# Altium PCB JacdacNRF52833HighPower 32.PcbDoc (part 2 of 2)
Units mil, origin at the board's own origin, x right, y up, seen from the top; angles counter-clockwise.
Board outline 1541.27 x 1415.28 mil, 2 copper layers (Top Layer, Bottom Layer), stack 60.044 mil thick; 63 components, 36 nets, 260 pads, 44 vias.
Unrouted connection lines stored in the file: 13.
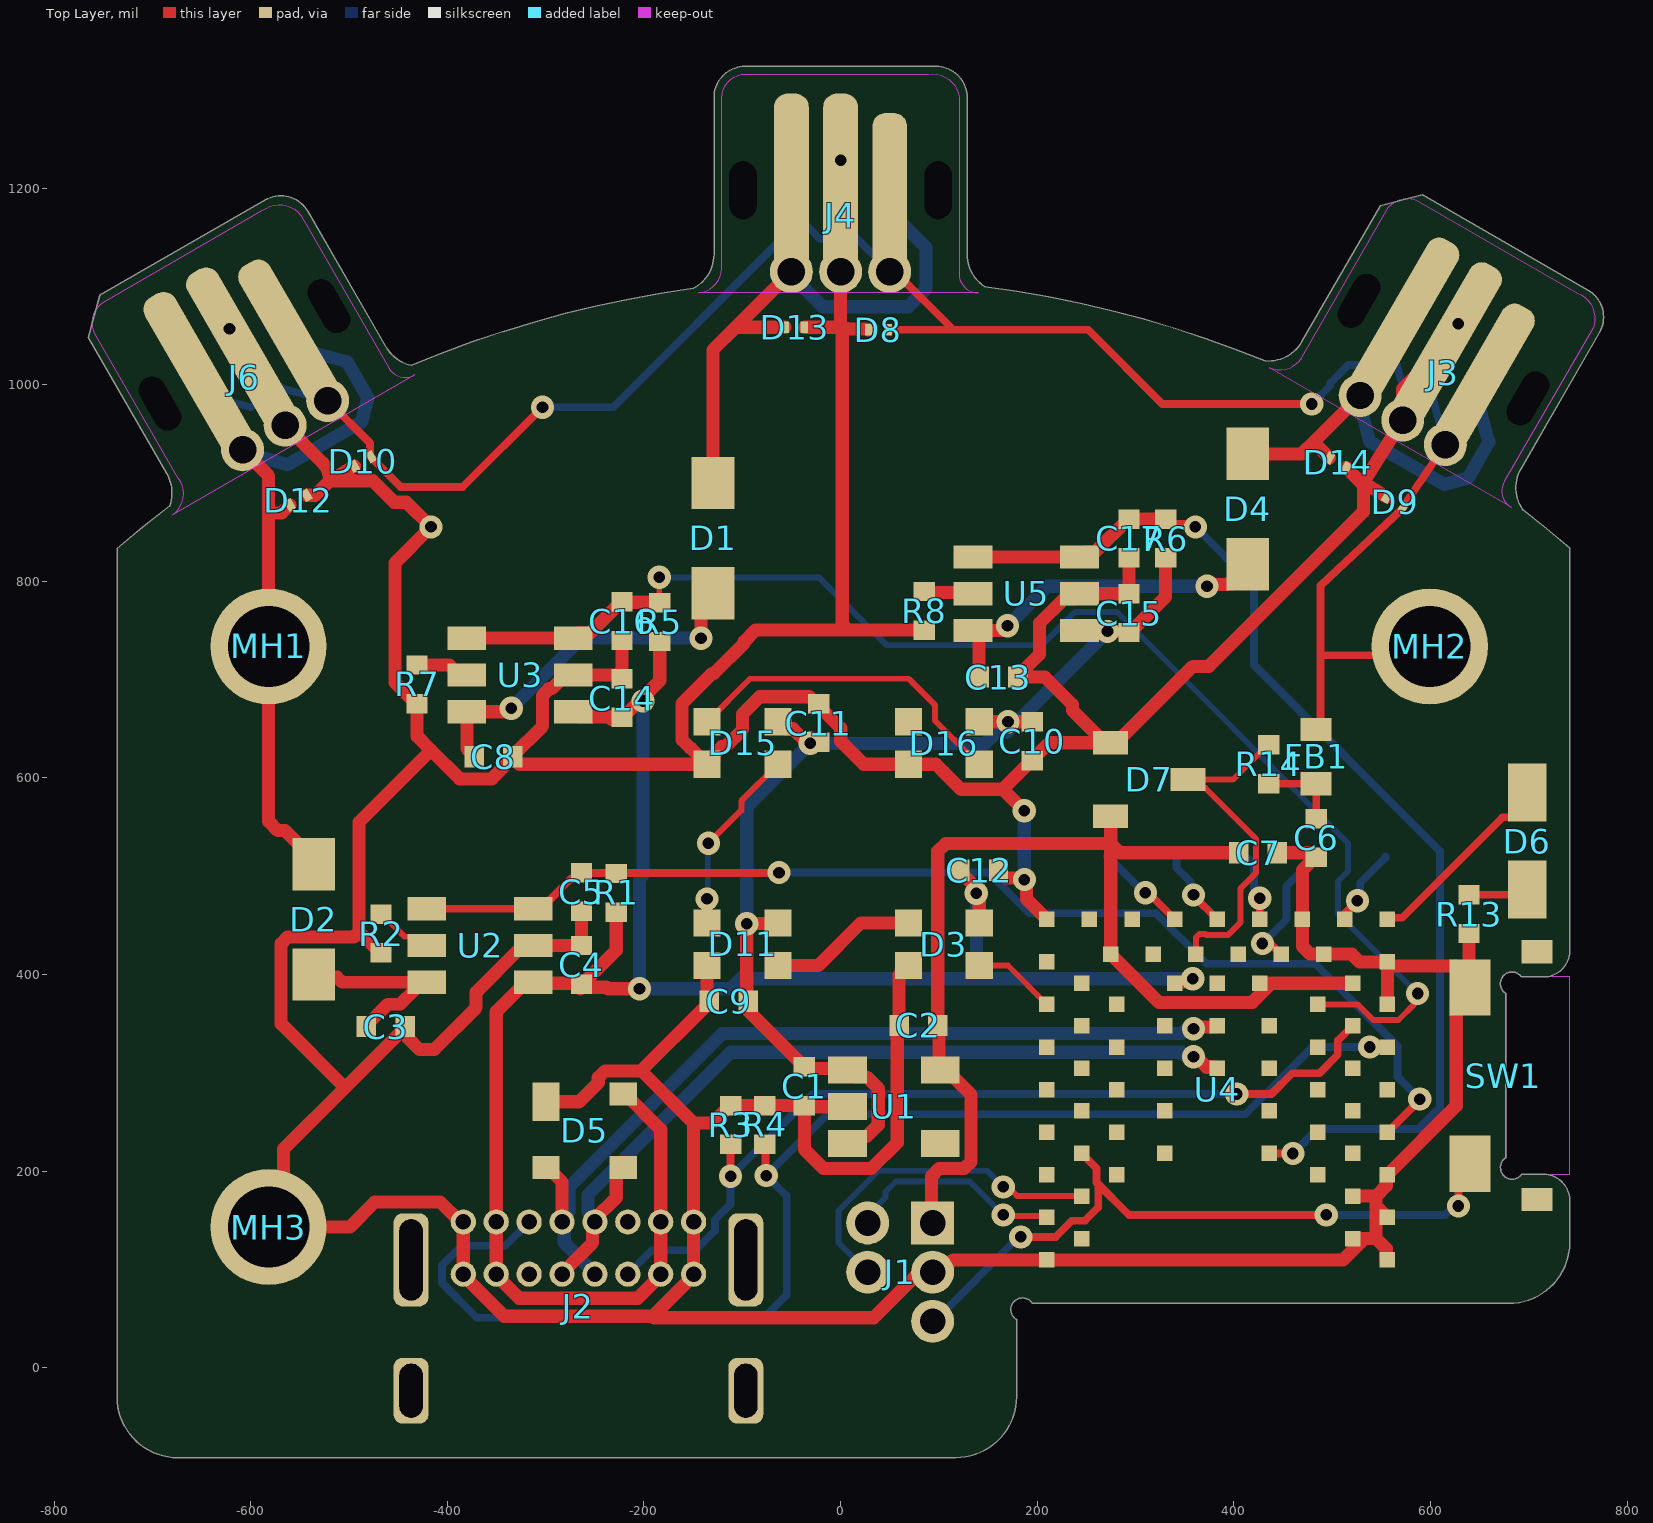
[diagram p0: Top Layer view]

## Via types
v1: diameter 23.62, hole 11.81, Top Layer to Bottom Layer, tented both sides, 44 vias

## Nets (pads, with @x,y where several pads share a name; then routed paths per layer and width w, separated by ;. In a path a pad name is that pad's centre, name@x,y a point inside that pad or via, vN(x,y) a via of type N, cw(c..) or ccw(c..) an arc to the next point about the centre after c; other vN are vias at no path point) (continued)
GND: (continued)
  Top Layer w13.39: J6.2@-565.04,958.7 -527.17,920.84 cw(c-545.77,902.24) -519.47,902.24 ; D12.2 -534.18,887.53 -519.47,902.24 ; D10.2 -519.47,902.24 ; R2.1 -468.42,421.99 -489.88,443.44 ; D5.1 -265.98,270.58 -246.5,290.07 -246.5,295.08 -239.69,301.88 -202.51,301.88 ; C5.1 C4.1 U2.2 -317.69,424.45 -328.21,424.45 -370.78,381.89 -370.78,366.29 -413.34,323.73 -428.35,323.73 -439.79,335.17 -439.79,346.05 -441.38,347.64 -504.08,284.95 ; C16.1 -222.32,709.53 -227.11,704.75 U3.2 -279.74,704.75 -293.72,690.77 -296.36,690.77 -303.17,683.97 -303.17,652.7 -333.4,622.47 C8.1 C8.1@-333.4,620.5 ; D11.2 C9.1@-135.75,369.4 ; C9.1 -135.75,370.38 C9.1@-135.75,369.4 ; D13.2 -2.47,1058.44 -1,1056.97 ; 0,1064.57 J4.2@0,1115.08 ; U1.2 C1.1@-36.86,265.58 ; D8.2 27.61,1056.73 7.84,1056.73 7.6,1056.97 -1,1056.97 ; D3.2 59.55,399.68 C2.1 57.58,346.26 57.58,228.91 31.46,202.78 -17.54,202.78 -36.86,222.1 C1.1@-36.86,265.58 ; R8.1 7.84,750.3 ; v1(186.83,566.51) 164.89,588.44 ; v1(187,496.58) 188.96,494.63 188.96,477.05 U4.30 ; C17.1 293.46,787.41 C15.1 243.05,787.36 U5.2 237.88,782.3 227.36,782.3 202.33,757.27 202.33,725.59 180.25,703.51 C13.1 207.93,702.53 235.81,674.65 235.81,668.74 D7.1@268.81,635.75 ; C7.1 478.23,523.79 482.78,519.25 469.7,506.17 U4.19 469.7,428.56 477.54,420.72 U4.18 519.9,420.72 527.77,412.84 U4.15 ; D14.2 514.33,915.37 529.09,900.61 531.86,900.61 ; U4.2 532.84,131.35 ; U4.4 544.8,174.65 ; D9.2 531.86,900.61 ; U4.1 555.13,110.88 555.13,121.01 544.8,131.35 ; U4.3 544.8,164.52 ; U4.13 U4.15 ; J3.2@615.16,1038.99 571.86,995.68 571.86,963.98 531.86,900.61 ; R13.1 SW1.2@639.27,395.58 ; -519.47,902.24 -475.85,902.24 -454.03,880.42 -441.74,880.42 v1(-416.6,855.29) -453.2,818.69 -453.2,696.88 -431.75,675.42 R7.1 -430.76,642.38 -416.6,628.22 ; -504.08,284.95 -566.78,222.25 -566.78,158.13 MH3.1 -499.24,143.11 -473.76,168.59 -407.32,168.59 -387.04,148.32 J2.A1 J2.B12 -383.74,94.11 -342.08,52.45 -191.15,52.45 ; -504.08,284.95 -569.06,349.92 -569.06,431.43 -562.25,438.24 -495.08,438.24 -489.88,443.44 ; -489.88,443.44 -489.88,554.94 -416.6,628.22 ; -416.6,628.22 -387.43,599.04 -354.86,599.04 C8.1@-333.4,620.5 ; C8.1@-333.4,620.5 -326.74,613.84 D15.2 ; -202.51,301.88 -202.51,302.63 C9.1@-135.75,369.4 ; -202.51,301.88 -149.49,248.85 ; -191.15,52.45 -189.57,50.88 33.72,50.88 83.48,100.64 90.23,100.64 J1.3 101.81,97.26 114.24,109.69 U4.45 511.18,109.69 532.84,131.35 ; -191.15,52.45 -149.49,94.11 J2.B1 J2.A12 -149.49,248.85 ; -149.49,248.85 -130.65,248.85 -112.83,266.67 R3.2 R4.2 C1.1 C1.1@-36.86,265.58 ; D15.2 -152.3,630.39 -152.98,630.39 -161.14,638.55 -161.14,675.74 -130.59,706.29 -128.73,706.29 -98.18,736.84 -98.18,738.69 -86.58,750.3 7.84,750.3 ; D15.2 -132.59,613.84 -128.66,617.76 -128.66,623.91 -120.82,631.75 -117.16,631.75 -99.72,649.18 -99.72,665.11 -82.29,682.54 -31.6,682.54 0.16,650.78 0.16,637.27 23.59,613.84 D16.2 97.04,613.84 105,605.88 122.43,588.44 164.89,588.44 ; -1,1056.97 1.66,1054.31 1.66,756.48 7.84,750.3 ; 164.89,588.44 194.03,617.58 196,617.58 199.15,620.73 199.15,622.7 212.19,635.75 D7.1@268.81,635.75 ; D7.1@268.81,635.75 D7.1 280.62,635.75 358.31,713.44 374.72,713.44 531.86,870.58 531.86,900.61 ; 532.84,131.35 544.8,131.35 ; 544.8,131.35 544.8,164.52 ; 544.8,164.52 544.8,174.65 ; 544.8,174.65 555.13,184.99 555.13,195.13 U4.5 626.33,266.32 626.33,372.7 SW1.2 639.27,387.71 SW1.2@639.27,395.58 ; U4.15 560.64,408.52 626.33,408.52 SW1.2@639.27,395.58
  Bottom Layer w13.39: v1(186.83,566.51) 186.91,566.42 186.91,496.67 v1(187,496.58)
  other v1: -621.63,1056.73 628.45,1062 0,1228.27
JD_DATA: D8.1 D9.1 D10.1 FB1.1 J3.1 J4.1 J6.1 MH2.1 | length 1884.2
  Top Layer w7.87: J6.1@-521.74,983.7 -478.68,940.64 -478.68,927.78 -476.08,925.19 -476.08,924.47 -447.59,895.97 -384.26,895.97 v1(-303.17,977.06) ; D8.1 109.23,1055.78 ; J4.1@50,1191.85 50,1115.08 55.26,1115.08 111.89,1058.44 109.23,1055.78 ; v1(479.35,980.36) 327.19,980.36 251.77,1055.78 109.23,1055.78 ; FB1.1 488.29,653.65 488.29,724.69 ; MH2.1 590.32,724.69 488.29,724.69 ; J3.1@615.16,938.98 573.6,877.5 D9.1 571.63,874.09 488.29,795.73 488.29,724.69
  Bottom Layer w7.87: v1(-303.17,977.06) -231.17,977.06 -62.64,1145.59 -56.07,1145.59 -51.46,1150.2 J4.1@-51.46,1178.75 ; v1(479.35,980.36) 479.56,980.36 498.04,998.84 498.04,1001.61 516.4,1019.97 536.49,1019.97 559.6,1043.08 580.23,1063.71 J3.1@580.23,1078.48
JD_DATA_MCU: D7.3 R14.1 U4.24 | length 351.8
  Top Layer w6: U4.24 361.43,437.59 364.95,441.11 371.18,441.11 371.93,440.36 394.24,440.36 406.66,452.78 406.66,487.29 422.75,503.38 422.75,537.9 371.12,589.53 362.27,589.53 D7.3 399.31,598.35 434.52,633.55 R14.1
JD_PWR0: D2.1 D12.1 J6.3 MH1.1 | length 480.8
  Top Layer w13.39: J6.3@-608.34,933.7 -581.79,907.15 -581.79,869.48 ; D12.1 -568.38,869.48 -581.79,869.48 ; D2.1 -535.79,517.17 -564.98,546.36 -572.32,546.36 -581.79,555.83 MH1.1 -581.79,869.48
JD_PWR1: D1.1 D13.1 J4.3 | length 298.3
  Top Layer w13.39: D1.1 -129.76,1035.32 -106.64,1058.44 ; D13.1 -106.64,1058.44 ; J4.3@-50,1115.08 -106.64,1058.44
JD_PWR2: D4.1 D14.1 J3.3 | length 162.9
  Top Layer w13.39: D4.1 469.18,929.6 482.78,943.2 ; D14.1 482.78,939.93 482.78,943.2 ; J3.3@528.56,988.98 482.78,943.2
JD_STATUS: D6.2 U4.16 | length 201
  Top Layer w7.87: U4.16 558,457.83 571.34,457.83 673.41,559.9 682.75,559.9 698.49,575.65 D6.2
NEOPIXEL_DATA: D3.3 U4.33 | length 85.2
  Top Layer w6: D3.3 170.28,409.11 U4.33
NetC3_2: C3.2 D2.2 U2.6 | length 202.4
  Top Layer w13: D2.2 -535.79,397.4 -512.14,397.4 -506.91,392.17 -434.03,392.17 U2.6 ; C3.2 -482.31,348.05 -460.58,369.78 -448.07,369.78 -434.03,383.83 -434.03,386.85 -428.9,391.99 U2.6@-420.66,391.99
NetC6_2: C6.2 FB1.2 R14.2 | length 83.7
  Top Layer w7.87: R14.2 483.59,594.18 FB1.2 C6.2
NetC8_2: C8.2 D1.2 U3.6 | length 368.7
  Top Layer w13.39: C8.2 -372.77,622.47 -380.13,629.83 U3.6 -338.43,667.35 v1(-334.99,670.79) ; v1(-142,742.15) -142,775.47 D1.2
  Bottom Layer w13.39: v1(-334.99,670.79) -263.63,742.15 v1(-142,742.15)
NetC13_2: C13.2 D4.2 U5.6 | length 352.5
  Top Layer w13.39: U5.6 165.13,750.01 v1(169.82,754.71) ; C13.2 U5.6@140.88,744.89 ; v1(372.69,794.9) 374.65,796.85 393.49,796.85 394.14,797.51 399.07,797.51 414.03,812.47 D4.2
  Bottom Layer w13.39: v1(169.82,754.71) 210.01,794.9 v1(372.69,794.9)
NetD3_1: D3.1 D11.3 | length 150.6
  Top Layer w13.39: D11.3 -22.56,409.11 20.75,452.42 D3.1
NetD6_1: D6.1 R13.2 | length 61.5
  Top Layer w7.87: R13.2 693.06,481.13 D6.1
NetD11_1: D11.1 D15.3 | length 191.3
  Top Layer w6: v1(-135.82,476.95) -135.75,476.88 D11.1 ; v1(-134.44,533.46) -100.94,566.96 -100.94,576.6 D15.3
  Bottom Layer w6: v1(-135.82,476.95) -135.13,477.64 -135.13,532.77 v1(-134.44,533.46)
NetD15_1: D15.1 D16.3 | length 340.2
  Top Layer w6: D15.1 -92.05,700.85 69.26,700.85 95.85,674.26 95.85,658.34 133.26,620.92 133.94,620.92 D16.3
NetR2_2: R2.2 U2.5 | length 59.8
  Top Layer w6: R2.2 -466.45,461.36 -443.47,438.38 -429.65,438.38 U2.5
NetR7_2: R7.2 U3.5 | length 54.8
  Top Layer w13.39: R7.2 -398.05,714.79 -388.01,704.75 U3.5
NetR8_2: R8.2 U5.5 | length 50.4
  Top Layer w13.39: R8.2 86.36,788.54 133.61,788.54 U5.5
NetTP2_1: TP2.1 U4.17 | length 80.8
  Top Layer w7.87: U4.17 513.01,462.39 v1(525.72,475.1)
  Bottom Layer w7.87: v1(525.72,475.1) 528.74,478.11 528.74,493.32 554.18,518.76 TP2.1
NetTP3_1: TP3.1 U4.20 | length 134.3
  Top Layer w7.87: v1(429.08,431.54) 432.1,428.53 440.23,428.53 U4.20
  Bottom Layer w7.87: v1(429.08,431.54) 453.67,456.13 453.67,490.3 TP3.1
NetTP4_1: TP4.1 U4.21 | length 69.6
  Top Layer w7.87: U4.21 v1(426.39,477.64)
  Bottom Layer w7.87: TP4.1 420.5,511.87 420.5,487.79 426.39,481.9 v1(426.39,477.64)
NetTP5_1: TP5.1 U4.23 | length 81
  Top Layer w7.87: v1(359.01,480.97) 359.01,480.22 U4.23
  Bottom Layer w7.87: TP5.1 341.58,508.53 356,494.11 356,483.99 v1(359.01,480.97)
NetTP6_1: TP6.1 U4.25 | length 95.5
  Top Layer w7.87: v1(310.05,483.1) 312.83,483.1 U4.25
  Bottom Layer w7.87: TP6.1 271.96,519.93 308.8,483.1 v1(310.05,483.1)
RESET: J1.5 SW1.1 U4.40 | length 708.7
  Top Layer w7.87: v1(183.3,133.12) 218.79,133.12 235.29,149.62 248.53,149.62 262.02,163.11 262.02,186.2 ; U4.40 260.36,202.89 260.36,188.39 293.3,155.46 v1(494,155.46) ; v1(628.45,164.52) 628.45,195.68 SW1.1
  Bottom Layer w7.87: J1.5 95.53,47.26 181.38,133.12 v1(183.3,133.12) ; v1(494,155.46) 615.13,155.46 624.19,164.52 v1(628.45,164.52)
SWCLK: J1.4 U4.42 | length 349.7
  Top Layer w6: v1(165.54,184) 170.31,184 179.66,174.65 U4.42
  Bottom Layer w6: J1.4 -2.16,127.03 -2.16,159.59 38.63,200.39 149.15,200.39 v1(165.54,184)
SWDIO: J1.2 U4.43 | length 222.7
  Top Layer w6: v1(165.54,155.46) 166.77,154.23 208.63,154.23 U4.43
  Bottom Layer w6: J1.2 27.61,154.98 45.56,172.94 45.56,178.72 56.31,189.47 131.53,189.47 v1(165.54,155.46)
USB_D_N: D5.3 J2.A7 J2.B7 U4.68 | length 872.7
  Top Layer w13.39: J2.B7 -283.34,96.22 -252.22,127.35 -252.22,145.98 J2.A7 -249.88,151.43 -228.19,173.12 -228.19,198.53 -223.07,203.65 D5.3 ; v1(359.01,316.25) 361.78,316.25 372.28,305.76 381.91,305.76 U4.68
  Bottom Layer w13.39: J2.A7 -249.88,151.62 -256.97,158.71 -256.97,175.75 -111.84,320.87 347.15,320.87 349.82,318.21 357.06,318.21 v1(359.01,316.25)
USB_D_P: D5.2 J2.A6 J2.B6 U4.67 | length 896
  Top Layer w13.39: D5.2 -297.87,203.65 -283.34,189.12 J2.A6 ; v1(359.01,344.79) 360.93,346.7 381.91,346.7 U4.67
  Bottom Layer w13.39: J2.B6 -249.88,96.22 -281.01,127.35 -281.01,145.98 J2.A6 -283.34,151.62 -276.26,158.71 -276.26,183.74 -119.84,340.16 347.15,340.16 349.82,342.83 357.06,342.83 v1(359.01,344.79)
VUSB: C1.2 C4.2 C9.2 C10.2 C11.2 C12.2 C14.2 C15.2 D3.4 D5.4 D11.4 D15.4 D16.4 J2.A4 J2.A9 J2.B4 J2.B9 R1.1 R5.1 R6.1 U1.1 U1.3 U2.1 U3.1 U4.58 U5.1 | length 3262.5
  Top Layer w13.39: U2.1 -320.45,392.17 -350.27,362.34 J2.B9 -350.27,94.11 -326.92,70.76 -206.31,70.76 -182.95,94.11 J2.B4 J2.A9 -182.95,242.27 -219.13,278.46 D5.4 ; U2.1@-307.46,391.18 -267.77,391.18 C4.2@-264.62,388.03 ; U3.1 -266.75,662.23 -235.77,662.23 -233.15,659.61 ; C4.2@-264.62,385.52 C4.2@-264.62,387.05 ; R1.1@-230.47,465.69 R1.1 -228.19,424.66 -262.65,390.2 C4.2 -264.62,389.21 C4.2@-264.62,388.03 ; C14.2 -221.34,661.58 -183.91,699.01 R5.1 ; v1(-204.55,385.52) -236.44,385.52 -237.97,387.05 C4.2@-264.62,387.05 ; D11.4 -64.13,451.99 -95.05,451.99 v1(-95.48,451.56) -95.48,364.66 -40.99,310.17 -40.99,309.19 -37.84,306.04 C1.2 -35.33,304.51 5.43,304.51 U1.1 14.05,295.89 26.53,295.89 38.26,284.17 38.26,246.99 26.53,235.26 U1.3@10.69,235.26 ; D15.4 -56.61,650.06 -48.53,650.06 -33.61,635.14 v1(-30.84,635.14) ; U1.3@10.69,226.56 U1.3@14.48,226.56 ; C12.2 121.34,505.19 136.14,490.39 136.14,484.61 v1(138.1,482.65) 141.03,479.73 D3.4 ; D16.4 v1(170.28,657.15) 170.38,657.05 194.92,657.05 C10.2 ; v1(271.54,748.97) 292.42,748.97 C15.2 294.44,747.94 330.67,784.17 R6.1 ; U4.58 340.96,392.37 352.2,392.37 355.52,395.69 v1(358.29,395.69) ; C4.2@-264.62,387.05 C4.2@-264.62,388.03
  Bottom Layer w13.39: v1(-200.88,678.17) -200.88,501.32 -204.55,497.65 v1(-204.55,385.52) -111.56,385.52 -101.39,395.69 ; v1(138.1,482.65) 138.17,482.58 138.17,395.69 ; v1(271.54,748.97) 168.71,646.14 158.19,646.14 147.18,635.14 v1(-30.84,635.14) -95.48,570.5 v1(-95.48,451.56) -95.48,401.6 -101.39,395.69 ; v1(358.29,395.69) 138.17,395.69 ; -101.39,395.69 138.17,395.69
pads on no net: D16.1 J2.1 J2.2 J2.3 J2.4 J2.A8 J2.B8 J3. J4. J6. SW1.3 SW1.4 U1.4 U4.6 U4.8 U4.9 U4.10 U4.22 U4.26 U4.27 U4.29 U4.31 U4.32 U4.34 U4.35 U4.36 U4.37 U4.38 U4.39 U4.41 U4.44 U4.46 U4.48 U4.49 U4.50 U4.51 U4.52 U4.53 U4.54 U4.57 U4.59 U4.60 U4.61 U4.62 U4.63 U4.64 U4.65 U4.66

## Silkscreen, mask and mechanical layers (free items; w line width, h text height)
Bottom Overlay:
  region: -409.54,845.65 -409.54,650.28 439.54,650.28 439.54,845.65
  region: -710.93,368.59 -710.93,280.99 -609.99,280.99 -609.99,368.59
  text "P6" at 303.83,563.18 h30
  text "P5" at 371.13,563.18 h30
  text "P4" at 436.54,563.18 h30
  text "P3" at 507,563.18 h30
  text "P1" at 571.93,563.43 h30
  text "'.ProjectCodeName'" at 410.78,392.72 h60
  text "'.ProjectCodenameID'-'.ProjectRevision'" at -310.19,301.74 h60
Board Outline:
  lines w3.94: -735.91,833.34 -735.91,-29.68 ccw(c-674.06,-29.68) -674.06,-91.53 117.19,-91.54 ; -735.68,833.33 cw(c3.38,-22.54) -682.49,876.52 ; -436.39,1019.35 cw(c3.16,-22.53) -149.93,1097.86 ; 117.19,-91.38 ccw(c117.19,-29.53) 179.04,-29.53 179.04,49.49 ; 146.61,1099.34 cw(c3.24,-22.34) 431.7,1024.15 ; 178.28,49.49 cw(c185.05,59.16) 195.07,65.42 ; 195.02,65.51 679.83,65.51 ccw(c679.83,127.35) 741.68,127.35 741.68,166.76 ccw(c714.76,169.79) 717.78,196.71 ; 694.05,872.68 cw(c3.16,-22.53) 741.66,833.83 741.65,427.55 cw(c714.76,424.53) 717.78,397.6

## Text inside footprints (layer, text, board x,y; h text height)
J3: Alignment "board outline  / for 'innie'" at 676.48,788.5 h47.24 r330; Alignment "board outline  / for 'outie'" at 753.27,873.5 h47.24 r330; Mechanical 9 "JACDAC  / cable connector  / body" at 593.65,1381.34 h66.93 r330; Mechanical 3 "Bevel/chamfer edge of PCB here" at 807,1135.04 h66.93 r330; Top Courtyard "board outline  / for 'outie'" at 753.27,873.5 h47.24 r330
J4: Alignment "board outline  / for 'innie'" at 178.35,1015.43 h47.24; Alignment "board outline  / for 'outie'" at 202.35,1127.43 h47.24; Mechanical 9 "JACDAC  / cable connector  / body" at -189.81,1487.43 h66.93; Mechanical 3 "Bevel/chamfer edge of PCB here" at 118.11,1380.8 h66.93; Top Courtyard "board outline  / for 'outie'" at 202.35,1127.43 h47.24
J6: Alignment "board outline  / for 'innie'" at -360.76,961.57 h47.24 r30; Alignment "board outline  / for 'outie'" at -395.97,1070.57 h47.24 r30; Mechanical 9 "JACDAC  / cable connector  / body" at -915.59,1186.26 h66.93 r30; Mechanical 3 "Bevel/chamfer edge of PCB here" at -595.61,1247.88 h66.93 r30; Top Courtyard "board outline  / for 'outie'" at -395.97,1070.57 h47.24 r30
MH1: Assembly Notes "5mm dia keepout  / for traces and  / components to  / allow space for  / bushes/standoffs/ / nuts/screw heads" at -616.79,843.67 h19.68 r90; Assembly Notes "board outline can  / be on 2.0mm   / radius if necessary" at -441.79,843.67 h19.68 r90
MH2: Assembly Notes "board outline can  / be on 2.0mm   / radius if necessary" at 739.29,843.67 h19.68 r90; Assembly Notes "5mm dia keepout  / for traces and  / components to  / allow space for  / bushes/standoffs/ / nuts/screw heads" at 564.29,843.67 h19.68 r90
MH3: Assembly Notes "5mm dia keepout  / for traces and  / components to  / allow space for  / bushes/standoffs/ / nuts/screw heads" at -546.79,33.12 h19.68 r270; Assembly Notes "board outline can  / be on 2.0mm   / radius if necessary" at -721.79,33.11 h19.68 r270